# Altium PCB 数粒机接收板2通道.PcbDoc (part 2 of 2)
Units mm, origin at the board's own origin, x right, y up, seen from the top; angles counter-clockwise.
Board outline 152 x 52 mm, 2 copper layers (Top Layer, Bottom Layer); 73 components, 51 nets, 228 pads, 94 vias.
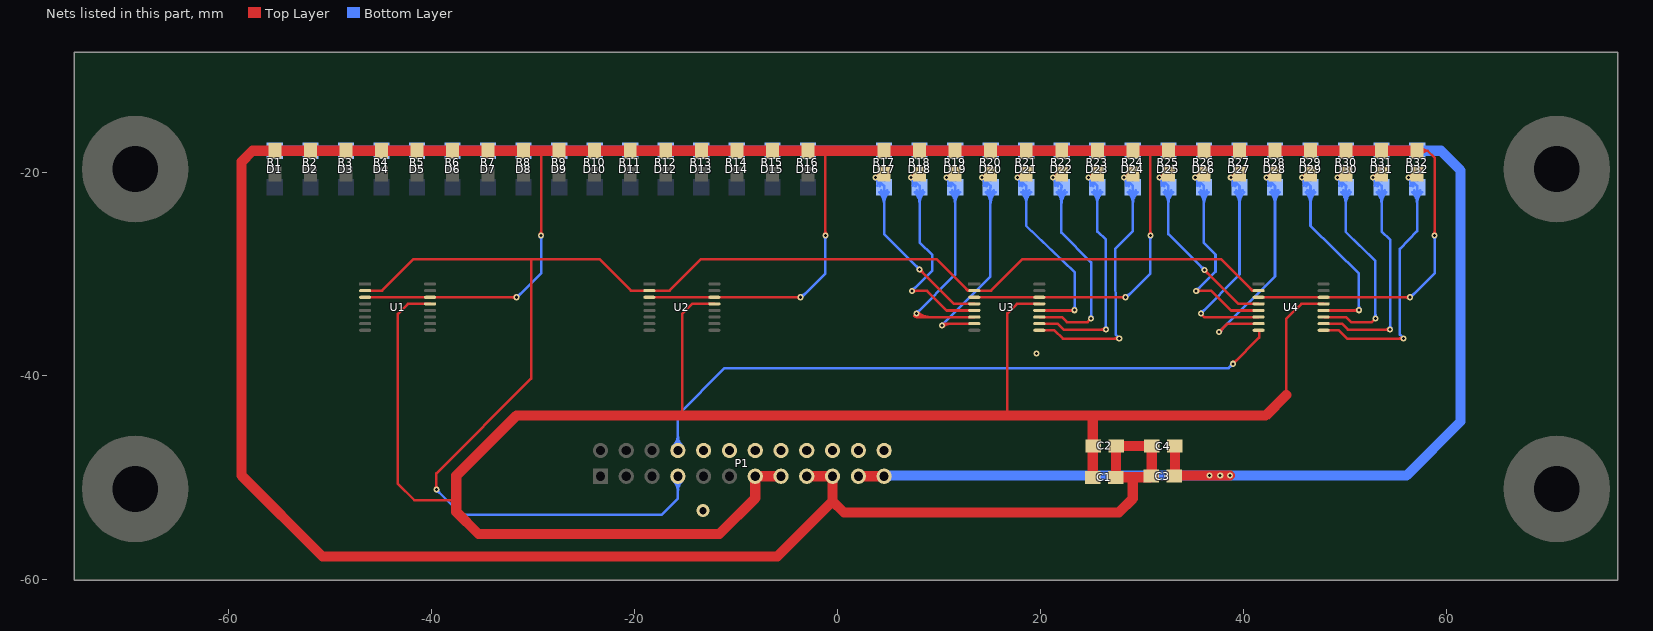
[diagram p2: the nets of this part, all layers, seen from the top]

## Via types
v1: diameter 0.6, hole 0.3, Top Layer to Bottom Layer, 93 vias
v2: diameter 1.27, hole 0.711, Top Layer to Bottom Layer, 1 vias

## Nets (pads, with @x,y where several pads share a name; then routed paths per layer and width w, separated by ;. In a path a pad name is that pad's centre, name@x,y a point inside that pad or via, vN(x,y) a via of type N, cw(c..) or ccw(c..) an arc to the next point about the centre after c; other vN are vias at no path point) (continued)
CH3-1: D17.1 R17.2 U3.4 | length 29
  Top Layer w0.254: v1@3.693,-20.518 cw(c4.11,-20.936) R17.2@4.439,-20.446 ; v1(3.726,-20.435) 3.776,-20.435 4.103,-20.108 R17.2@4.581,-20.108 ; v1@3.911,-20.3 cw(c4.285,-20.674) R17.2@4.581,-20.235 ; v1@8.082,-29.688 cw(c8.082,-30.105) 8.377,-29.81 cw(c8.672,-29.515) v1@8.255,-29.515 ; v1(8.082,-29.515) 11.464,-32.897 U3.4@13.468,-32.897
  Bottom Layer w0.254: v1@3.726,-20.608 cw(c3.726,-21.025) 4.021,-20.73 cw(c4.316,-20.435) v1@3.899,-20.435 ; v1(3.726,-20.435) 4.581,-21.29 D17.1@4.581,-21.422 4.581,-26.014 v1(8.082,-29.515) ; D17.1@3.924,-21.276 ccw(c2.966,-21.063) 3.66,-20.369 ccw(c4.578,-19.451) D17.1@4.58,-20.749 ; D17.1@3.987,-20.696 cw(c3.501,-21.182) D17.1@4.172,-21.331 ; D17.1@4.105,-21.898 cw(c2.956,-23.047) 4.581,-23.047 ; D17.1@4.284,-21.718 cw(c3.569,-22.433) 4.581,-22.433 cw(c5.592,-22.433) D17.1@4.877,-21.718 ; 4.581,-23.047 cw(c6.205,-23.047) D17.1@5.056,-21.898 ; v1@7.909,-29.515 ccw(c7.491,-29.515) 7.786,-29.219 ccw(c8.082,-28.924) v1@8.082,-29.342
CH3-2: D18.1 R18.2 U3.5 | length 31.2
  Top Layer w0.254: v1@7.193,-20.518 cw(c7.61,-20.936) R18.2@7.939,-20.446 ; v1(7.226,-20.435) 7.276,-20.435 7.603,-20.108 R18.2@8.081,-20.108 ; v1(7.321,-31.617) 8.82,-31.617 10.749,-33.547 U3.5@13.468,-33.547 ; v1@7.411,-20.3 cw(c7.785,-20.674) R18.2@8.081,-20.235 ; v1@7.444,-31.74 cw(c7.739,-32.035) 7.739,-31.617 cw(c7.739,-31.2) v1@7.444,-31.495
  Bottom Layer w0.254: v1@7.226,-20.608 cw(c7.226,-21.025) 7.521,-20.73 cw(c7.816,-20.435) v1@7.399,-20.435 ; v1(7.226,-20.435) 8.081,-21.29 D18.1@8.081,-21.422 8.081,-26.839 9.334,-28.093 9.334,-29.605 v1(7.321,-31.617) ; v1@7.321,-31.444 ccw(c7.321,-31.027) 7.617,-31.322 ccw(c7.912,-31.617) v1@7.494,-31.617 ; D18.1@7.424,-21.276 ccw(c6.466,-21.063) 7.16,-20.369 ccw(c8.078,-19.451) D18.1@8.08,-20.749 ; D18.1@7.487,-20.696 cw(c7.001,-21.182) D18.1@7.672,-21.331 ; D18.1@7.605,-21.898 cw(c6.456,-23.047) 8.081,-23.047 ; D18.1@7.784,-21.718 cw(c7.069,-22.433) 8.081,-22.433 cw(c9.092,-22.433) D18.1@8.377,-21.718 ; 8.081,-23.047 cw(c9.705,-23.047) D18.1@8.556,-21.898
CH3-3: D19.1 R19.2 U3.6 | length 34.5
  Top Layer w0.254: 7.542,-34.064 ccw(c7.862,-33.744) 7.862,-34.197 ; v1@7.721,-33.884 ccw(c8.475,-33.13) 8.475,-34.197 ; v1(7.778,-33.827) 7.778,-34.132 7.843,-34.197 U3.6@13.468,-34.197 ; v1@7.901,-33.705 ccw(c9.088,-32.517) 9.088,-34.197 ; v1@10.693,-20.518 cw(c11.11,-20.936) R19.2@11.439,-20.446 ; v1(10.726,-20.435) 10.776,-20.435 11.103,-20.108 R19.2@11.581,-20.108 ; v1@10.911,-20.3 cw(c11.285,-20.674) R19.2@11.581,-20.235
  Bottom Layer w0.254: v1(7.778,-33.827) 11.581,-30.025 D19.1@11.581,-21.422 11.581,-21.29 v1(10.726,-20.435) ; v1@7.778,-33.654 ccw(c7.778,-33.237) 8.074,-33.532 ccw(c8.369,-33.827) v1@7.951,-33.827 ; v1@10.726,-20.608 cw(c10.726,-21.025) 11.021,-20.73 cw(c11.316,-20.435) v1@10.899,-20.435 ; D19.1@10.924,-21.276 ccw(c9.965,-21.063) 10.66,-20.369 ccw(c11.578,-19.451) D19.1@11.58,-20.749 ; D19.1@10.987,-20.696 cw(c10.501,-21.182) D19.1@11.172,-21.331 ; D19.1@11.105,-21.898 cw(c9.956,-23.047) 11.581,-23.047 ; D19.1@11.284,-21.718 cw(c10.569,-22.433) 11.581,-22.433 cw(c12.592,-22.433) D19.1@11.877,-21.718 ; 11.581,-23.047 cw(c13.205,-23.047) D19.1@12.056,-21.898
CH3-4: D20.1 R20.2 U3.7 | length 32.2
  Top Layer w0.254: v1@10.21,-34.989 cw(c10.554,-35.333) 10.554,-34.847 ; v1(10.268,-35.046) 10.268,-34.998 10.419,-34.847 U3.7@13.468,-34.847 ; v1@10.39,-35.169 cw(c11.167,-35.946) 11.167,-34.847 ; v1@14.193,-20.518 cw(c14.61,-20.936) R20.2@14.939,-20.446 ; v1(14.226,-20.435) 14.276,-20.435 14.603,-20.108 R20.2@15.081,-20.108 ; v1@14.411,-20.3 cw(c14.785,-20.674) R20.2@15.081,-20.235
  Bottom Layer w0.254: v1(10.268,-35.046) 10.268,-34.998 15.049,-30.217 15.049,-21.454 D20.1@15.081,-21.422 15.081,-21.29 v1(14.226,-20.435) ; v1@10.268,-34.873 ccw(c10.268,-34.573) 10.48,-34.785 ; v1@10.441,-35.046 cw(c10.976,-35.046) 10.597,-34.668 ; v1@14.226,-20.608 cw(c14.226,-21.025) 14.521,-20.73 cw(c14.816,-20.435) v1@14.399,-20.435 ; D20.1@14.424,-21.276 ccw(c13.466,-21.063) 14.16,-20.369 ccw(c15.078,-19.451) D20.1@15.08,-20.749 ; D20.1@14.487,-20.696 cw(c14.001,-21.182) D20.1@14.672,-21.331 ; D20.1@14.605,-21.898 cw(c13.533,-22.97) 15.049,-22.97 ; D20.1@14.784,-21.718 cw(c14.146,-22.357) 15.049,-22.357 ; 15.049,-23.123 cw(c16.782,-23.123) D20.1@15.556,-21.898 ; 15.049,-22.51 cw(c16.169,-22.51) D20.1@15.377,-21.718
CH3-5: D21.1 R21.2 U3.12 | length 30.3
  Top Layer w0.254: v1@17.693,-20.518 cw(c18.11,-20.936) R21.2@18.439,-20.446 ; v1(17.726,-20.435) 17.776,-20.435 18.103,-20.108 R21.2@18.581,-20.108 ; v1@17.911,-20.3 cw(c18.285,-20.674) R21.2@18.581,-20.235 ; U3.12@19.919,-33.547 23.324,-33.547 v1(23.349,-33.522) ; 22.872,-33.547 ccw(c22.872,-33.046) v1@23.226,-33.4 ; 22.99,-33.547 cw(c22.99,-33.881) v1@23.226,-33.645
  Bottom Layer w0.254: v1@17.726,-20.608 cw(c17.726,-21.025) 18.021,-20.73 cw(c18.316,-20.435) v1@17.899,-20.435 ; v1(17.726,-20.435) 18.581,-21.29 D21.1@18.581,-21.422 18.581,-25.206 23.349,-29.778 v1(23.349,-33.522) ; D21.1@17.924,-21.276 ccw(c16.965,-21.063) 17.66,-20.369 ccw(c18.578,-19.451) D21.1@18.58,-20.749 ; D21.1@17.987,-20.696 cw(c17.501,-21.182) D21.1@18.172,-21.331 ; D21.1@18.105,-21.898 cw(c16.956,-23.047) 18.581,-23.047 ; D21.1@18.284,-21.718 cw(c17.569,-22.433) 18.581,-22.433 cw(c19.592,-22.433) D21.1@18.877,-21.718 ; 18.581,-23.047 cw(c20.205,-23.047) D21.1@19.056,-21.898 ; v1@23.226,-33.4 ccw(c22.931,-33.105) 23.349,-33.105 ccw(c23.766,-33.105) v1@23.471,-33.4
CH3-6: D22.1 R22.2 U3.11 | length 31.6
  Top Layer w0.254: U3.11@19.919,-34.197 22.093,-34.197 22.587,-34.691 24.619,-34.691 v1(24.974,-34.335) ; v1@21.193,-20.518 cw(c21.61,-20.936) R22.2@21.939,-20.446 ; v1(21.226,-20.435) 21.276,-20.435 21.603,-20.108 R22.2@22.081,-20.108 ; v1@21.411,-20.3 cw(c21.785,-20.674) R22.2@22.081,-20.235
  Bottom Layer w0.254: v1@21.226,-20.608 cw(c21.226,-21.025) 21.521,-20.73 cw(c21.816,-20.435) v1@21.399,-20.435 ; v1(21.226,-20.435) 22.081,-21.29 D22.1@22.081,-21.422 ; D22.1@21.424,-21.276 ccw(c20.466,-21.063) 21.16,-20.369 ccw(c22.078,-19.451) D22.1@22.08,-20.749 ; D22.1@21.487,-20.696 cw(c21.001,-21.182) D22.1@21.672,-21.331 ; D22.1@21.605,-21.898 cw(c20.556,-22.946) 22.039,-22.946 ; D22.1@21.784,-21.718 cw(c21.169,-22.333) 22.039,-22.333 ; 22.039,-23.147 cw(c23.806,-23.147) D22.1@22.556,-21.898 ; 22.039,-22.534 cw(c23.193,-22.534) D22.1@22.377,-21.718 ; D22.1@22.039,-21.422 22.039,-25.882 24.974,-28.817 v1(24.974,-34.335) ; v1@24.852,-34.213 ccw(c24.557,-33.918) 24.974,-33.918 ccw(c25.392,-33.918) v1@25.097,-34.213
CH3-7: D23.1 R23.2 U3.10 | length 33.8
  Top Layer w0.254: U3.10@19.919,-34.847 21.676,-34.847 22.256,-35.427 v1(26.422,-35.427) ; v1@24.693,-20.518 cw(c25.11,-20.936) R23.2@25.439,-20.446 ; v1(24.726,-20.435) 24.776,-20.435 25.103,-20.108 R23.2@25.581,-20.108 ; v1@24.911,-20.3 cw(c25.285,-20.674) R23.2@25.581,-20.235 ; v1@26.3,-35.55 ccw(c26.004,-35.845) 26.004,-35.427 ccw(c26.004,-35.01) v1@26.3,-35.305
  Bottom Layer w0.254: v1@24.726,-20.608 cw(c24.726,-21.025) 25.021,-20.73 cw(c25.316,-20.435) v1@24.899,-20.435 ; v1(24.726,-20.435) 25.581,-21.29 D23.1@25.581,-21.422 25.581,-25.78 26.422,-26.57 v1(26.422,-35.427) ; D23.1@24.924,-21.276 ccw(c23.966,-21.063) 24.66,-20.369 ccw(c25.578,-19.451) D23.1@25.58,-20.749 ; D23.1@24.987,-20.696 cw(c24.501,-21.182) D23.1@25.172,-21.331 ; D23.1@25.105,-21.898 cw(c23.956,-23.047) 25.581,-23.047 ; D23.1@25.284,-21.718 cw(c24.569,-22.433) 25.581,-22.433 cw(c26.592,-22.433) D23.1@25.877,-21.718 ; 25.581,-23.047 cw(c27.205,-23.047) D23.1@26.056,-21.898 ; v1@26.3,-35.305 ccw(c26.004,-35.01) 26.422,-35.01 ccw(c26.84,-35.01) v1@26.544,-35.305
CH3-8: D24.1 R24.2 U3.9 | length 35.9
  Top Layer w0.254: U3.9@19.919,-35.497 21.361,-35.497 22.18,-36.316 27.717,-36.316 v1(27.743,-36.291) ; 27.264,-36.316 ccw(c27.264,-35.812) v1@27.621,-36.169 ; 27.387,-36.316 cw(c27.387,-36.647) v1@27.621,-36.413 ; v1@28.193,-20.518 cw(c28.61,-20.936) R24.2@28.939,-20.446 ; v1(28.226,-20.435) 28.276,-20.435 28.603,-20.108 R24.2@29.081,-20.108 ; v1@28.411,-20.3 cw(c28.785,-20.674) R24.2@29.081,-20.235
  Bottom Layer w0.254: v1(27.743,-36.291) 27.387,-35.935 27.336,-27.482 29.081,-25.737 D24.1@29.081,-21.422 29.081,-21.29 v1(28.226,-20.435) ; v1@28.226,-20.608 cw(c28.226,-21.025) 28.521,-20.73 cw(c28.816,-20.435) v1@28.399,-20.435 ; D24.1@28.424,-21.276 ccw(c27.465,-21.063) 28.16,-20.369 ccw(c29.078,-19.45) D24.1@29.08,-20.749 ; D24.1@28.487,-20.696 cw(c28.001,-21.182) D24.1@28.672,-21.331 ; D24.1@28.605,-21.898 cw(c27.456,-23.047) 29.081,-23.047 cw(c30.705,-23.047) D24.1@29.557,-21.898 ; D24.1@28.784,-21.718 cw(c28.069,-22.433) 29.081,-22.433 cw(c30.092,-22.433) D24.1@29.377,-21.718
CH4: P1.8 U4.8 | length 69.9
  Top Layer w0.254: v1(38.939,-38.798) 41.519,-36.219 41.519,-35.548 U4.8@41.468,-35.497 ; v1@38.939,-38.625 ccw(c38.939,-38.208) 39.235,-38.503 ccw(c39.53,-38.798) v1@39.112,-38.798 ; U4.8@41.452,-35.513 cw(c41.29,-35.675) 41.519,-35.675
  Bottom Layer w0.254: P1.8@-16.172,-46.889 ccw(c-17.235,-45.826) -15.731,-45.826 ccw(c-14.227,-45.826) P1.8@-15.291,-46.889 ; P1.8@-15.992,-47.069 ccw(c-16.622,-46.439) -15.731,-46.439 ccw(c-14.84,-46.439) P1.8@-15.47,-47.069 ; P1.8@-15.731,-47.33 -15.731,-43.846 -11.116,-39.231 38.507,-39.231 v1(38.939,-38.798) ; v1@38.766,-38.798 cw(c38.349,-38.798) 38.644,-39.093 cw(c38.939,-39.389) v1@38.939,-38.971
CH4-1: D25.1 R25.2 U4.4 | length 29
  Top Layer w0.254: v1@31.693,-20.518 cw(c32.11,-20.936) R25.2@32.439,-20.446 ; v1(31.726,-20.435) 31.776,-20.435 32.103,-20.108 R25.2@32.581,-20.108 ; v1@31.911,-20.3 cw(c32.285,-20.674) R25.2@32.581,-20.235 ; v1@36.125,-29.73 cw(c36.125,-30.148) 36.42,-29.853 cw(c36.715,-29.557) v1@36.298,-29.557 ; v1(36.125,-29.557) 39.464,-32.897 U4.4@41.468,-32.897
  Bottom Layer w0.254: v1@31.726,-20.608 cw(c31.726,-21.025) 32.021,-20.73 cw(c32.316,-20.435) v1@31.899,-20.435 ; v1(31.726,-20.435) 32.581,-21.29 D25.1@32.581,-21.422 32.581,-26.014 v1(36.125,-29.557) ; D25.1@31.924,-21.276 ccw(c30.966,-21.063) 31.66,-20.369 ccw(c32.578,-19.451) D25.1@32.58,-20.749 ; D25.1@31.987,-20.696 cw(c31.501,-21.182) D25.1@32.172,-21.331 ; D25.1@32.105,-21.898 cw(c30.956,-23.047) 32.581,-23.047 ; D25.1@32.284,-21.718 cw(c31.569,-22.433) 32.581,-22.433 cw(c33.592,-22.433) D25.1@32.877,-21.718 ; 32.581,-23.047 cw(c34.205,-23.047) D25.1@33.056,-21.898 ; v1@35.952,-29.557 ccw(c35.534,-29.557) 35.829,-29.262 ccw(c36.125,-28.967) v1@36.125,-29.385
CH4-2: D26.1 R26.2 U4.5 | length 31.1
  Top Layer w0.254: v1@35.193,-20.518 cw(c35.61,-20.936) R26.2@35.939,-20.446 ; v1(35.226,-20.435) 35.276,-20.435 35.603,-20.108 R26.2@36.081,-20.108 ; v1(35.321,-31.617) 36.82,-31.617 38.749,-33.547 U4.5@41.468,-33.547 ; v1@35.411,-20.3 cw(c35.785,-20.674) R26.2@36.081,-20.235 ; v1@35.444,-31.74 cw(c35.739,-32.035) 35.739,-31.617 cw(c35.739,-31.2) v1@35.444,-31.495
  Bottom Layer w0.254: v1@35.226,-20.608 cw(c35.226,-21.025) 35.521,-20.73 cw(c35.816,-20.435) v1@35.399,-20.435 ; v1(35.226,-20.435) 36.081,-21.29 D26.1@36.081,-21.422 36.081,-26.898 37.223,-28.04 37.223,-29.716 v1(35.321,-31.617) ; v1@35.321,-31.444 ccw(c35.321,-31.027) 35.617,-31.322 ccw(c35.912,-31.617) v1@35.494,-31.617 ; D26.1@35.424,-21.276 ccw(c34.466,-21.063) 35.16,-20.369 ccw(c36.078,-19.451) D26.1@36.08,-20.749 ; D26.1@35.487,-20.696 cw(c35.001,-21.182) D26.1@35.672,-21.331 ; D26.1@35.605,-21.898 cw(c34.456,-23.047) 36.081,-23.047 ; D26.1@35.784,-21.718 cw(c35.069,-22.433) 36.081,-22.433 cw(c37.092,-22.433) D26.1@36.377,-21.718 ; 36.081,-23.047 cw(c37.705,-23.047) D26.1@36.556,-21.898
CH4-3: D27.1 R27.2 U4.6 | length 31.9
  Top Layer w0.254: v1(35.779,-33.827) 35.779,-33.878 36.097,-34.197 U4.6@41.468,-34.197 ; v1@38.693,-20.518 cw(c39.11,-20.936) R27.2@39.439,-20.446 ; v1(38.726,-20.435) 38.776,-20.435 39.103,-20.108 R27.2@39.581,-20.108 ; v1@38.911,-20.3 cw(c39.285,-20.674) R27.2@39.581,-20.235
  Bottom Layer w0.254: v1@35.778,-33.654 ccw(c35.777,-33.237) 36.073,-33.531 ccw(c36.369,-33.825) v1@35.951,-33.827 ; v1(35.779,-33.827) 39.581,-30.003 D27.1@39.581,-21.422 39.581,-21.29 v1(38.726,-20.435) ; v1@38.726,-20.608 cw(c38.726,-21.025) 39.021,-20.73 cw(c39.316,-20.435) v1@38.899,-20.435 ; D27.1@38.924,-21.276 ccw(c37.965,-21.063) 38.66,-20.369 ccw(c39.578,-19.451) D27.1@39.58,-20.749 ; D27.1@38.987,-20.696 cw(c38.501,-21.182) D27.1@39.172,-21.331 ; D27.1@39.105,-21.898 cw(c37.956,-23.047) 39.581,-23.047 ; D27.1@39.284,-21.718 cw(c38.569,-22.433) 39.581,-22.433 cw(c40.592,-22.433) D27.1@39.877,-21.718 ; 39.581,-23.047 cw(c41.205,-23.047) D27.1@40.057,-21.898
CH4-4: D28.1 R28.2 U4.7 | length 33.5
  Top Layer w0.254: v1(37.582,-35.684) 38.419,-34.847 U4.7@41.468,-34.847 ; v1@37.582,-35.511 ccw(c37.582,-35.093) 37.877,-35.388 ccw(c38.173,-35.684) v1@37.755,-35.684 ; v1@42.193,-20.518 cw(c42.61,-20.936) R28.2@42.939,-20.446 ; v1(42.226,-20.435) 42.276,-20.435 42.603,-20.108 R28.2@43.081,-20.108 ; v1@42.411,-20.3 cw(c42.785,-20.674) R28.2@43.081,-20.235
  Bottom Layer w0.254: v1(37.582,-35.684) 43.081,-30.185 D28.1@43.081,-21.422 43.081,-21.29 v1(42.226,-20.435) ; v1@37.582,-35.511 ccw(c37.582,-35.093) 37.877,-35.388 ccw(c38.173,-35.684) v1@37.755,-35.684 ; v1@42.226,-20.608 cw(c42.226,-21.025) 42.521,-20.73 cw(c42.816,-20.435) v1@42.399,-20.435 ; D28.1@42.424,-21.276 ccw(c41.465,-21.063) 42.16,-20.369 ccw(c43.077,-19.451) D28.1@43.08,-20.749 ; D28.1@42.487,-20.696 cw(c42.001,-21.182) D28.1@42.672,-21.331 ; D28.1@42.605,-21.898 cw(c41.456,-23.046) 43.081,-23.046 ; D28.1@42.784,-21.718 cw(c42.069,-22.433) 43.081,-22.433 cw(c44.092,-22.433) D28.1@43.377,-21.718 ; 43.081,-23.047 cw(c44.705,-23.047) D28.1@43.557,-21.898
CH4-5: D29.1 R29.2 U4.12 | length 30.2
  Top Layer w0.254: v1@45.693,-20.518 cw(c46.11,-20.936) R29.2@46.439,-20.446 ; v1(45.726,-20.435) 45.776,-20.435 46.103,-20.108 R29.2@46.581,-20.108 ; v1@45.911,-20.3 cw(c46.285,-20.674) R29.2@46.581,-20.235 ; U4.12@47.919,-33.547 51.324,-33.547 v1(51.349,-33.522) ; 50.872,-33.547 ccw(c50.872,-33.046) v1@51.226,-33.4 ; 50.99,-33.547 cw(c50.99,-33.881) v1@51.226,-33.645
  Bottom Layer w0.254: v1@45.726,-20.608 cw(c45.726,-21.025) 46.021,-20.73 cw(c46.316,-20.435) v1@45.899,-20.435 ; v1(45.726,-20.435) 46.581,-21.29 D29.1@46.581,-21.422 46.581,-25.206 51.349,-29.923 v1(51.349,-33.522) ; D29.1@45.924,-21.276 ccw(c44.966,-21.063) 45.66,-20.369 ccw(c46.578,-19.451) D29.1@46.58,-20.749 ; D29.1@45.987,-20.696 cw(c45.501,-21.182) D29.1@46.172,-21.331 ; D29.1@46.105,-21.898 cw(c44.956,-23.047) 46.581,-23.047 ; D29.1@46.284,-21.718 cw(c45.569,-22.433) 46.581,-22.433 cw(c47.592,-22.433) D29.1@46.877,-21.718 ; 46.581,-23.047 cw(c48.205,-23.047) D29.1@47.056,-21.898 ; v1@51.226,-33.4 ccw(c50.931,-33.105) 51.349,-33.105 ccw(c51.766,-33.105) v1@51.471,-33.4
CH4-6: D30.1 R30.2 U4.11 | length 31.6
  Top Layer w0.254: U4.11@47.919,-34.197 50.093,-34.197 50.587,-34.691 52.619,-34.691 v1(52.974,-34.335) ; v1@49.193,-20.518 cw(c49.61,-20.936) R30.2@49.939,-20.446 ; v1(49.226,-20.435) 49.276,-20.435 49.603,-20.108 R30.2@50.081,-20.108 ; v1@49.411,-20.3 cw(c49.785,-20.674) R30.2@50.081,-20.235
  Bottom Layer w0.254: v1@49.226,-20.608 cw(c49.226,-21.025) 49.521,-20.73 cw(c49.816,-20.435) v1@49.399,-20.435 ; v1(49.226,-20.435) 50.081,-21.29 D30.1@50.081,-21.422 ; D30.1@49.424,-21.276 ccw(c48.466,-21.063) 49.16,-20.369 ccw(c50.078,-19.451) D30.1@50.08,-20.749 ; D30.1@49.487,-20.696 cw(c49.001,-21.182) D30.1@49.672,-21.331 ; D30.1@49.605,-21.898 cw(c48.556,-22.946) 50.039,-22.946 ; D30.1@49.784,-21.718 cw(c49.17,-22.333) 50.039,-22.333 ; 50.039,-23.147 cw(c51.806,-23.147) D30.1@50.557,-21.898 ; 50.039,-22.534 cw(c51.193,-22.534) D30.1@50.377,-21.718 ; D30.1@50.039,-21.422 50.039,-25.794 52.974,-28.678 v1(52.974,-34.335) ; v1@52.852,-34.213 ccw(c52.557,-33.918) 52.974,-33.918 ccw(c53.392,-33.918) v1@53.097,-34.213
CH4-7: D31.1 R31.2 U4.10 | length 33.8
  Top Layer w0.254: U4.10@47.919,-34.847 49.676,-34.847 50.257,-35.427 v1(54.422,-35.427) ; v1@52.693,-20.518 cw(c53.11,-20.936) R31.2@53.439,-20.446 ; v1(52.726,-20.435) 52.776,-20.435 53.103,-20.108 R31.2@53.581,-20.108 ; v1@52.911,-20.3 cw(c53.285,-20.674) R31.2@53.581,-20.235 ; v1@54.3,-35.55 ccw(c54.004,-35.845) 54.004,-35.427 ccw(c54.004,-35.01) v1@54.3,-35.305
  Bottom Layer w0.254: v1@52.726,-20.608 cw(c52.726,-21.025) 53.021,-20.73 cw(c53.316,-20.435) v1@52.899,-20.435 ; v1(52.726,-20.435) 53.581,-21.29 D31.1@53.581,-21.422 53.581,-25.78 54.422,-26.57 v1(54.422,-35.427) ; D31.1@52.924,-21.276 ccw(c51.966,-21.063) 52.66,-20.369 ccw(c53.578,-19.451) D31.1@53.58,-20.749 ; D31.1@52.987,-20.696 cw(c52.501,-21.182) D31.1@53.172,-21.331 ; D31.1@53.105,-21.898 cw(c51.956,-23.047) 53.581,-23.047 ; D31.1@53.284,-21.718 cw(c52.569,-22.433) 53.581,-22.433 cw(c54.592,-22.433) D31.1@53.877,-21.718 ; 53.581,-23.047 cw(c55.205,-23.047) D31.1@54.056,-21.898 ; v1@54.3,-35.305 ccw(c54.004,-35.01) 54.422,-35.01 ccw(c54.84,-35.01) v1@54.544,-35.305
CH4-8: D32.1 R32.2 U4.9 | length 35.9
  Top Layer w0.254: U4.9@47.919,-35.497 49.361,-35.497 50.18,-36.316 55.718,-36.316 v1(55.743,-36.291) ; 55.264,-36.316 ccw(c55.264,-35.812) v1@55.621,-36.169 ; 55.387,-36.316 cw(c55.387,-36.647) v1@55.621,-36.413 ; v1@56.193,-20.518 cw(c56.61,-20.936) R32.2@56.939,-20.446 ; v1(56.226,-20.435) 56.276,-20.435 56.603,-20.108 R32.2@57.081,-20.108 ; v1@56.411,-20.3 cw(c56.785,-20.674) R32.2@57.081,-20.235
  Bottom Layer w0.254: v1(55.743,-36.291) 55.387,-35.935 55.387,-27.482 57.081,-25.737 D32.1@57.081,-21.422 57.081,-21.29 v1(56.226,-20.435) ; v1@56.226,-20.608 cw(c56.226,-21.025) 56.521,-20.73 cw(c56.816,-20.435) v1@56.399,-20.435 ; D32.1@56.424,-21.276 ccw(c55.465,-21.063) 56.16,-20.369 ccw(c57.078,-19.451) D32.1@57.08,-20.749 ; D32.1@56.487,-20.696 cw(c56.001,-21.182) D32.1@56.672,-21.331 ; D32.1@56.605,-21.898 cw(c55.456,-23.047) 57.081,-23.047 ; D32.1@56.784,-21.718 cw(c56.069,-22.433) 57.081,-22.433 cw(c58.092,-22.433) D32.1@57.377,-21.718 ; 57.081,-23.047 cw(c58.705,-23.047) D32.1@57.557,-21.898
CH5: P1.10
CH6: P1.12
CH7: P1.14
CH8: P1.16
CH9: P1.18
CH10: P1.20
CH11: P1.22
CH12: P1.24
EN: P1.7 U1.2 U2.2 U3.2 U4.2 | length 155.8
  Top Layer w0.254: U1.2@-46.532,-31.597 -44.86,-31.597 -41.757,-28.493 -30.225,-28.493 ; v1@-39.633,-51.072 ccw(c-39.928,-50.776) -39.51,-50.776 ccw(c-39.093,-50.776) v1@-39.388,-51.072 ; v1(-39.51,-51.194) -39.51,-51.204 -39.51,-49.594 -30.174,-40.258 -30.174,-28.544 -30.225,-28.493 ; 12.671,-31.43 ccw(c13.018,-31.083) U3.2@13.018,-31.574 ; 40.715,-31.448 ccw(c41.018,-31.145) U4.2@41.018,-31.574 ; U4.2@41.468,-31.597 40.863,-31.597 37.76,-28.493 18.218,-28.493 15.114,-31.597 U3.2@13.468,-31.597 12.838,-31.597 9.734,-28.493 -13.452,-28.493 -16.556,-31.597 U2.2@-18.532,-31.597 -20.356,-31.597 -23.459,-28.493 -30.225,-28.493
  Bottom Layer w0.254: v1@-39.51,-51.367 cw(c-39.51,-51.759) -39.233,-51.482 ; v1(-39.51,-51.194) -39.51,-51.204 -37.06,-53.654 -17.306,-53.654 -15.731,-52.08 P1.7@-15.731,-49.87 ; v1@-39.337,-51.194 ccw(c-38.895,-51.194) -39.208,-51.507 ; P1.7@-16.172,-50.31 cw(c-17.235,-51.374) -15.731,-51.374 cw(c-14.227,-51.374) P1.7@-15.291,-50.31 ; P1.7@-15.992,-50.131 cw(c-16.622,-50.761) -15.731,-50.761 cw(c-14.84,-50.761) P1.7@-15.47,-50.131
GND: C1.1 C2.1 C3.1 C4.1 P1.17 P1.19 R1.1 R2.1 R3.1 R4.1 R5.1 R6.1 R7.1 R8.1 R9.1 R10.1 R11.1 R12.1 R13.1 R14.1 R15.1 R16.1 R17.1 R18.1 R19.1 R20.1 R21.1 R22.1 R23.1 R24.1 R25.1 R26.1 R27.1 R28.1 R29.1 R30.1 R31.1 R32.1 U1.3 U1.14 U2.3 U2.14 U3.3 U3.14 U4.3 U4.14 | length 395.7
  Top Layer w0.254: U1.3@-46.532,-32.247 U1.14@-40.132,-32.247 v1(-31.636,-32.247) ; v1@-31.759,-32.369 ccw(c-32.054,-32.664) -32.054,-32.247 ccw(c-32.054,-31.829) v1@-31.759,-32.124 ; v1@-29.32,-26.027 ccw(c-29.616,-25.732) -29.198,-25.732 ccw(c-28.78,-25.732) v1@-29.076,-26.027 ; v1@-29.198,-25.946 -29.198,-17.822 ; U2.3@-18.532,-32.247 v1(-3.636,-32.247) ; v1@-3.759,-32.369 ccw(c-4.054,-32.664) -4.054,-32.247 ccw(c-4.054,-31.829) v1@-3.759,-32.124 ; v1@-1.32,-26.027 ccw(c-1.616,-25.732) -1.198,-25.732 ccw(c-0.78,-25.732) v1@-1.076,-26.027 ; v1@-1.198,-25.946 -1.198,-17.822 ; U3.3@13.468,-32.247 v1(28.364,-32.247) ; v1@28.241,-32.369 ccw(c27.946,-32.664) 27.946,-32.247 ccw(c27.946,-31.829) v1@28.241,-32.124 ; v1@30.68,-26.027 ccw(c30.384,-25.732) 30.802,-25.732 ccw(c31.22,-25.732) v1@30.924,-26.027 ; v1@30.802,-25.946 30.802,-17.822 ; U4.3@41.468,-32.247 U4.14@47.868,-32.247 v1(56.364,-32.247) ; v1@56.241,-32.369 ccw(c55.946,-32.664) 55.946,-32.247 ccw(c55.946,-31.829) v1@56.241,-32.124 ; R32.1@57.081,-17.822 58.124,-17.822 ; R32.1@57.481,-18.135 cw(c58.124,-18.639) 58.124,-17.822 ; R32.1@57.481,-17.509 ccw(c58.124,-17.005) 58.124,-17.822 ; v1@58.68,-26.027 ccw(c58.384,-25.732) 58.802,-25.732 ccw(c59.22,-25.732) v1@58.924,-26.027 ; v1@58.802,-25.946 58.802,-18.5 58.124,-17.822
  Top Layer w1: P1.17@-3.031,-49.87 P1.19@-0.491,-49.87 -0.491,-52.334 ; C2.1@27.463,-46.88 30.917,-46.88 C4.1@30.943,-46.905 30.943,-49.801 30.765,-49.979 29.074,-49.979 ; C2.1@27.474,-46.898 27.412,-46.96 C1.1@27.412,-49.979 29.074,-49.979 ; C3.1@30.132,-49.979 ccw(c30.132,-49.219) C3.1@30.67,-49.756 ; R32.1@57.081,-17.822 R31.1@53.581,-17.822 R30.1@50.081,-17.822 R29.1@46.581,-17.822 R28.1@43.081,-17.822 R27.1@39.581,-17.822 R26.1@36.081,-17.822 R25.1@32.581,-17.822 R24.1@29.081,-17.822 R23.1@25.581,-17.822 R22.1@22.081,-17.822 R21.1@18.581,-17.822 R20.1@15.081,-17.822 R19.1@11.581,-17.822 R18.1@8.081,-17.822 R17.1@4.581,-17.822 R16.1@-2.919,-17.822 R15.1@-6.419,-17.822 R14.1@-9.919,-17.822 R13.1@-13.419,-17.822 R12.1@-16.919,-17.822 R11.1@-20.419,-17.822 R10.1@-23.919,-17.822 R9.1@-27.419,-17.822 -29.198,-17.822 R8.1@-30.919,-17.822 R7.1@-34.419,-17.822 R6.1@-37.919,-17.822 R5.1@-41.419,-17.822 R4.1@-44.919,-17.822 R3.1@-48.419,-17.822 R2.1@-51.919,-17.822 R1.1@-55.419,-17.822 -57.622,-17.822 -58.687,-18.887 -58.687,-49.814 -50.732,-57.769 -5.927,-57.769 -0.491,-52.334 ; -0.491,-52.334 0.626,-53.451 27.703,-53.451 29.074,-52.08 29.074,-49.979
  Bottom Layer w0.254: v1@-31.636,-32.074 ccw(c-31.636,-31.475) -31.213,-31.898 ; v1@-31.573,-32.183 v1(-31.636,-32.247) -31.561,-32.247 -29.198,-29.883 v1(-29.198,-26.15) ; v1@-29.32,-26.272 cw(c-29.616,-26.567) -29.198,-26.567 cw(c-28.78,-26.567) v1@-29.076,-26.272 ; v1(-3.636,-32.247) v1@-3.573,-32.183 ; v1@-3.636,-32.074 ccw(c-3.636,-31.475) -3.213,-31.898 ; v1@-3.561,-32.247 -1.198,-29.883 v1(-1.198,-26.15) ; v1@-1.32,-26.272 cw(c-1.616,-26.567) -1.198,-26.567 cw(c-0.78,-26.567) v1@-1.076,-26.272 ; v1(28.364,-32.247) v1@28.427,-32.183 ; v1@28.364,-32.074 ccw(c28.364,-31.475) 28.787,-31.898 ; v1@28.439,-32.247 30.802,-29.883 v1(30.802,-26.15) ; v1@30.68,-26.272 cw(c30.384,-26.567) 30.802,-26.567 cw(c31.22,-26.567) v1@30.924,-26.272 ; v1(56.364,-32.247) v1@56.427,-32.183 ; v1@56.364,-32.074 ccw(c56.364,-31.475) 56.787,-31.898 ; v1@56.439,-32.247 58.802,-29.883 v1(58.802,-26.15) ; v1@58.68,-26.272 cw(c58.384,-26.567) 58.802,-26.567 cw(c59.22,-26.567) v1@58.924,-26.272
  other v1: 19.609,-37.77
  other v2: -13.259,-53.264
VCC3.3: C3.2 C4.2 D1.2 D2.2 D3.2 D4.2 D5.2 D6.2 D7.2 D8.2 D9.2 D10.2 D11.2 D12.2 D13.2 D14.2 D15.2 D16.2 D17.2 D18.2 D19.2 D20.2 D21.2 D22.2 D23.2 D24.2 D25.2 D26.2 D27.2 D28.2 D29.2 D30.2 D31.2 D32.2 P1.21 P1.23 | length 212.9
  Top Layer w1: P1.21@2.049,-49.87 P1.23@4.589,-49.87 ; C3.2@33.178,-49.852 33.236,-49.794 v1(36.618,-49.794) v1(37.685,-49.794) v1(38.65,-49.794) ; C3.2@33.229,-49.801 C4.2@33.229,-46.905
  Bottom Layer w1: D1.2@-55.419,-17.822 D2.2@-51.919,-17.822 D3.2@-48.419,-17.822 D4.2@-44.919,-17.822 D5.2@-41.419,-17.822 D6.2@-37.919,-17.822 D7.2@-34.419,-17.822 D8.2@-30.919,-17.822 D9.2@-27.419,-17.822 D10.2@-23.919,-17.822 D11.2@-20.419,-17.822 D12.2@-16.919,-17.822 D13.2@-13.419,-17.822 D14.2@-9.919,-17.822 D15.2@-6.419,-17.822 D16.2@-2.919,-17.822 D17.2@4.581,-17.822 D18.2@8.081,-17.822 D19.2@11.581,-17.822 D20.2@15.081,-17.822 D21.2@18.581,-17.822 D22.2@22.081,-17.822 D23.2@25.581,-17.822 D25.2@32.581,-17.822 D26.2@36.081,-17.822 D27.2@39.581,-17.822 D28.2@43.081,-17.822 D29.2@46.581,-17.822 D30.2@50.081,-17.822 D31.2@53.581,-17.822 D32.2@57.081,-17.822 59.426,-17.822 61.353,-19.749 61.353,-44.488 56.048,-49.794 v1(38.65,-49.794) v1(37.685,-49.794) v1(36.618,-49.794) 4.665,-49.794 P1.23@4.589,-49.87 ; P1.23@4.766,-50.047 cw(c5.376,-50.657) 5.376,-49.794
VCC5V: C1.2 C2.2 P1.13 P1.15 U1.13 U2.13 U3.13 U4.13 | length 206.6
  Top Layer w0.254: U1.13@-40.132,-32.897 -42.325,-32.897 -43.306,-33.878 -43.306,-50.616 -41.69,-52.232 -37.575,-52.232 ; -15.38,-43.901 -15.306,-43.827 -15.306,-33.878 -14.325,-32.897 U2.13@-12.132,-32.897 ; 16.725,-44.006 16.725,-43.901 16.725,-33.847 17.675,-32.897 U3.13@19.868,-32.897 ; 44.183,-41.872 44.183,-34.389 45.675,-32.897 U4.13@47.868,-32.897
  Top Layer w1: -22.296,-43.901 -31.632,-43.901 ; P1.15@-5.571,-49.87 P1.13@-8.111,-49.87 -8.111,-52.029 -11.642,-55.559 -35.365,-55.559 -37.561,-53.364 -37.561,-49.83 -31.632,-43.901 ; C1.2@25.126,-49.979 25.126,-43.915 25.112,-43.901 ; 25.329,-43.901 25.112,-43.901 ; 44.183,-41.872 42.154,-43.901 25.112,-43.901 ; -31.632,-43.901 -15.38,-43.901 16.725,-43.901 25.112,-43.901
pads on no net: P1.9 P1.11

## Polygon pours and split planes (outlines as drawn)
GND on Top Layer "top" (hatched 90Degree grid 0.508 track 0.2, remove dead copper, pour order 2): -75.311,-8.122 76.937,-8.122 76.937,-60.122 -75.311,-60.122
GND on Bottom Layer "bottom" (hatched 90Degree grid 0.508 track 0.2, remove dead copper, pour order 4): -75.336,-8.122 77.013,-8.122 77.013,-60.122 -75.336,-60.122

## Keep-outs
Keep-Out Layer:
  the board outline again, w0.254

## Silkscreen, mask and mechanical layers (free items; w line width, h text height)
Top Overlay:
  lines w0.254: -12.002,-51.122 -12.053,-51.122 -12.053,-52.312 -35.243,-52.312 -35.243,-43.599 16.319,-43.599 16.319,-52.312 -7.557,-52.312 -7.557,-51.14 ; -57.669,-24.122 -57.669,-15.122 -0.669,-15.122 -0.669,-24.122 -57.669,-24.122 ; 2.331,-24.122 2.331,-15.122 59.331,-15.122 59.331,-24.122 2.331,-24.122
  text "CH1" at -22.846,-42.354 h1.5 r90
  text "CH2" at -20.311,-42.354 h1.5 r90
  text "CH3" at -17.726,-42.354 h1.5 r90
  text "CH4" at -15.196,-42.409 h1.5 r90
  text "CH6" at -10.131,-42.409 h1.5 r90
  text "CH7" at -7.631,-42.409 h1.5 r90
  text "CH5" at -12.721,-42.439 h1.5 r90
  text "CH9" at -2.511,-42.439 h1.5 r90
  text "CH8" at -5.101,-42.464 h1.5 r90
  text "CH10" at 0.019,-42.464 h1.5 r90
  text "CH11" at 2.559,-42.464 h1.5 r90
  text "CH12" at 5.099,-42.464 h1.5 r90
  text "JIESHOU-V2-2" at 32.529,-54.474 h1.2
  text "2017-09-17" at 38.53,-56.332 h1.1
  text "A1" at -20.239,-57.554 h1.5 r90
  text "EN" at -15.094,-57.584 h1.5 r90
  text "A0" at -22.799,-57.609 h1.5 r90
  text "A2" at -17.654,-57.609 h1.5 r90
  text "NC" at -12.589,-57.639 h1.5 r90
  text "NC" at -10.004,-57.669 h1.5 r90
  text "+5V" at -7.499,-57.669 h1.5 r90
  text "+5V" at -4.969,-57.694 h1.5 r90
  text "GND" at -2.384,-57.724 h1.5 r90
  text "GND" at 0.121,-57.724 h1.5 r90
  text "V3.3" at 2.696,-57.724 h1.5 r90
  text "V3.3" at 5.236,-57.724 h1.5 r90
Mechanical 1:
  lines w0.254: -57.669,-19.622 -57.169,-19.622 ; -55.419,-21.422 -55.419,-19.622 ; -55.419,-17.822 -55.419,-19.622 ; -51.919,-21.422 -51.919,-19.622 -51.919,-17.822 ; -48.419,-21.422 -48.419,-19.622 -48.419,-17.822 ; -44.919,-21.422 -44.919,-19.622 -44.919,-17.822 ; -43.169,-30.622 -43.169,-19.622 ; -41.419,-21.422 -41.419,-19.622 -41.419,-17.822 ; -37.919,-21.422 -37.919,-19.622 -37.919,-17.822 ; -34.419,-21.422 -34.419,-19.622 -34.419,-17.822 ; -30.919,-21.422 -30.919,-19.622 -30.919,-17.822 ; -27.419,-21.422 -27.419,-19.622 -27.419,-17.822 ; -23.919,-21.422 -23.919,-19.622 -23.919,-17.822 ; -20.419,-21.422 -20.419,-19.622 -20.419,-17.822 ; -16.919,-21.422 -16.919,-19.622 -16.919,-17.822 ; -15.169,-30.622 -15.169,-19.622 ; -13.419,-21.422 -13.419,-19.622 -13.419,-17.822 ; -9.919,-21.422 -9.919,-19.622 -9.919,-17.822 ; -6.419,-21.422 -6.419,-19.622 -6.419,-17.822 ; -2.919,-21.422 -2.919,-19.622 -2.919,-17.822 ; -0.669,-19.622 -1.169,-19.622 -4.669,-19.622 -8.169,-19.622 -11.669,-19.622 -15.169,-19.622 ; 2.331,-19.622 2.831,-19.622 ; 4.581,-21.422 4.581,-19.622 ; 4.581,-17.822 4.581,-19.622 ; 8.081,-21.422 8.081,-19.622 8.081,-17.822 ; 11.581,-21.422 11.581,-19.622 11.581,-17.822 ; 15.081,-21.422 15.081,-19.622 15.081,-17.822 ; 16.831,-30.622 16.831,-19.622 ; 18.581,-21.422 18.581,-19.622 18.581,-17.822 ; 22.081,-21.422 22.081,-19.622 22.081,-17.822 ; 25.581,-21.422 25.581,-19.622 25.581,-17.822 ; 29.081,-21.422 29.081,-19.622 29.081,-17.822 ; 32.581,-21.422 32.581,-19.622 32.581,-17.822 ; 36.081,-21.422 36.081,-19.622 36.081,-17.822 ; 39.581,-21.422 39.581,-19.622 39.581,-17.822 ; 43.081,-21.422 43.081,-19.622 43.081,-17.822 ; 44.831,-30.622 44.831,-19.622 ; 46.581,-21.422 46.581,-19.622 46.581,-17.822 ; 50.081,-21.422 50.081,-19.622 50.081,-17.822 ; 53.581,-21.422 53.581,-19.622 53.581,-17.822 ; 57.081,-21.422 57.081,-19.622 57.081,-17.822 ; 59.331,-19.622 58.831,-19.622 55.331,-19.622 51.831,-19.622 48.331,-19.622 44.831,-19.622 ; -57.169,-19.622 -55.419,-19.622 ; -57.169,-19.622 -53.669,-19.622 -50.169,-19.622 -46.669,-19.622 -43.169,-19.622 ; -43.169,-19.622 -39.669,-19.622 -36.169,-19.622 -32.669,-19.622 -29.169,-19.622 -25.669,-19.622 -22.169,-19.622 -18.669,-19.622 -15.169,-19.622 ; 2.831,-19.622 6.331,-19.622 9.831,-19.622 13.331,-19.622 16.831,-19.622 ; 2.831,-19.622 4.581,-19.622 ; 16.831,-19.622 20.331,-19.622 23.831,-19.622 27.331,-19.622 30.831,-19.622 34.331,-19.622 37.831,-19.622 41.331,-19.622 44.831,-19.622